# Altium PCB wind_sensor_pcb.PcbDoc
Units mm, origin at the board's own origin, x right, y up, seen from the top; angles counter-clockwise.
Board outline 31.24 x 67.82 mm, 2 copper layers (Top Layer, Bottom Layer); 15 components, 153 nets, 49 pads, 0 vias.
Unrouted connection lines stored in the file: 27.
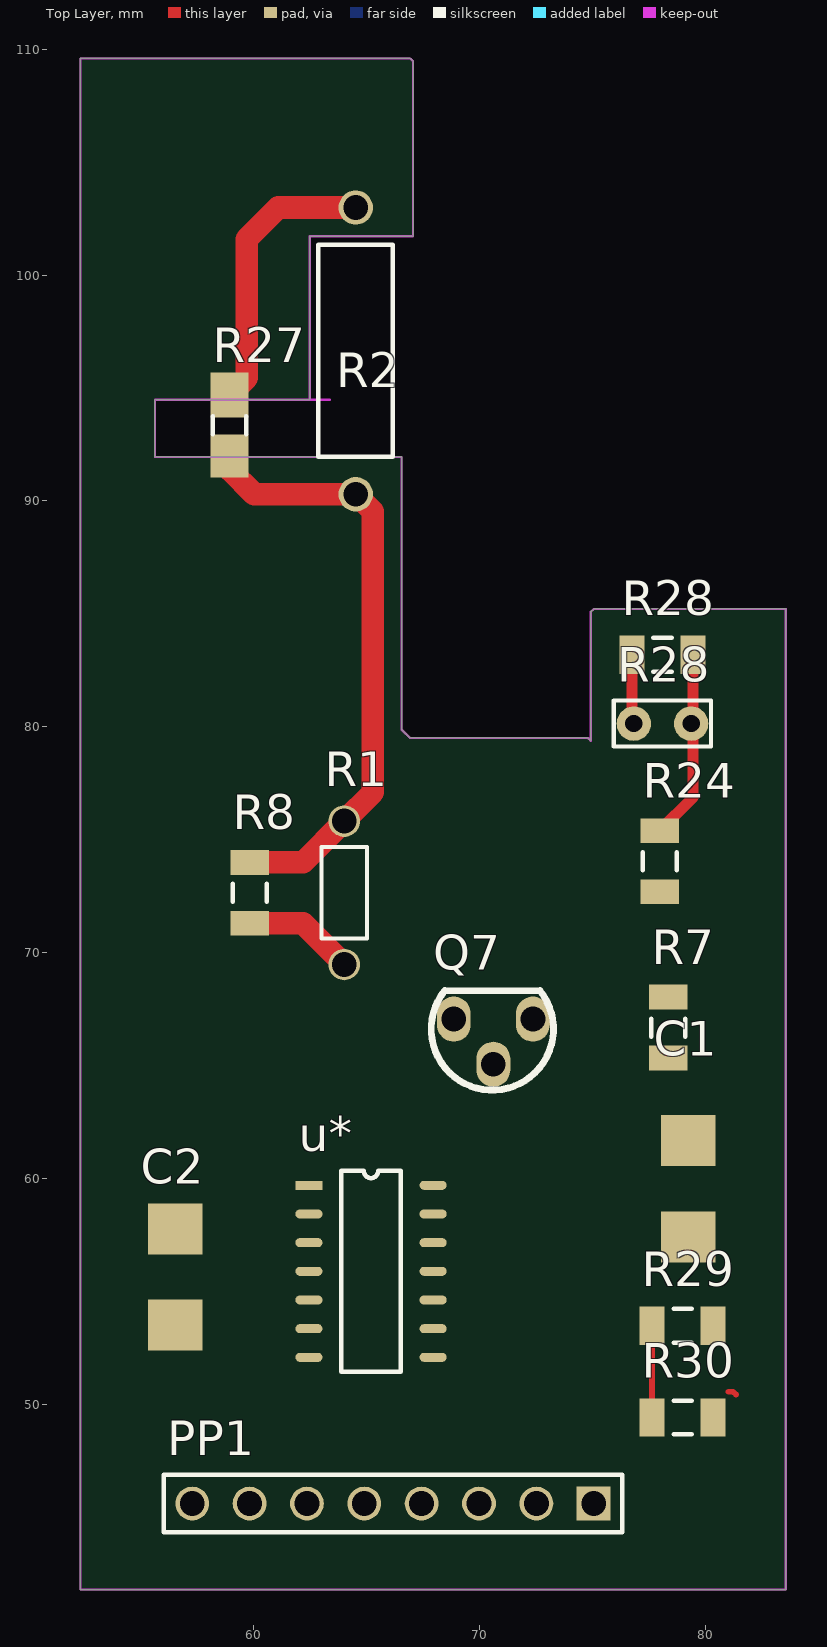
[diagram p0: Top Layer view]
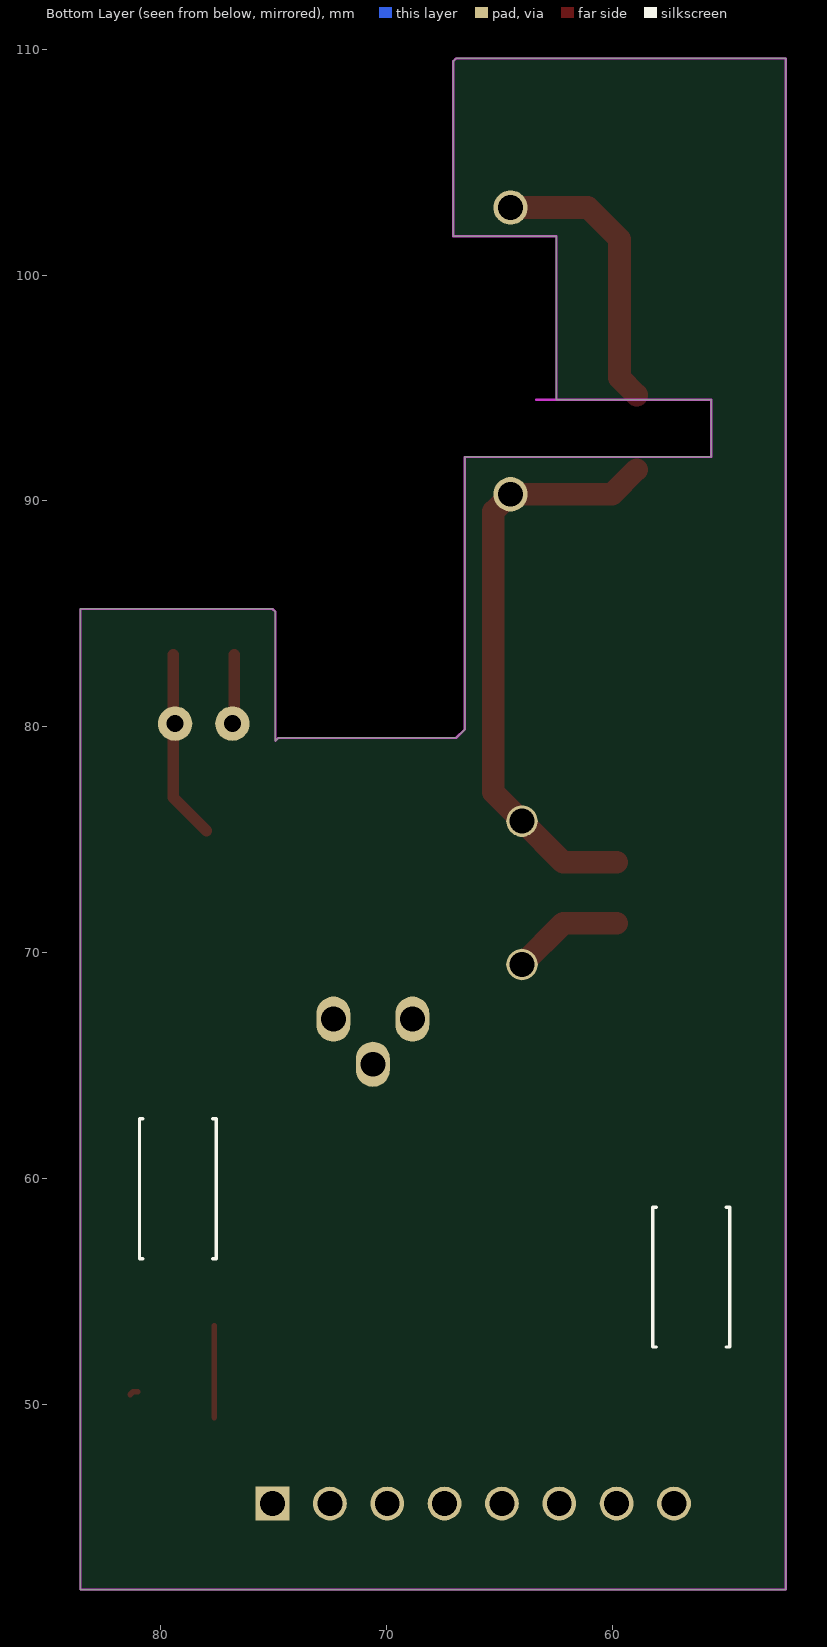
[diagram p1: Bottom Layer view, seen from below]

## Layer stack, top to bottom
Top Solder: solder mask 0.0102, Solder Resist, Dk 3.5
Top Layer: signal copper 0.0356
Dielectric 1: dielectric 0.32, FR-4, Dk 4.8
Bottom Layer: signal copper 0.0356
Bottom Solder: solder mask 0.0102, Solder Resist, Dk 3.5

## Board outline
55.626,91.948 55.626,94.488 62.484,94.488 62.484,101.727 67.056,101.727 67.056,109.474 66.929,109.601 52.324,109.601 52.324,41.783 83.566,41.783 83.566,85.217 75.057,85.217 74.93,85.09 74.93,79.375 74.803,79.502 66.929,79.502 66.548,79.883 66.548,91.948

## Design rules (kind name [scope] priority, off if disabled: settings)
Clearance [All] p1: gap=0.381 ignorepadtopadclearanceinfootprint=FALSE
PolygonConnect [All] p1: connectstyle=Relief reliefconductorwidth=0.254 reliefentries=4 polygonreliefangle="90 Angle" airgapwidth=0.254
RoutingVias [All] p1: holewidth=0.711 width=1.27 viastyle="Through Hole" minholewidth=0.711 minwidth=1.27 maxholewidth=0.711 maxwidth=1.27
SolderMaskExpansion [All] p1: expansion=0.102
Width [All] p1: maxlimit=0.254 minlimit=0.254 preferedwidth=0.254
30 further rules are at their usual default settings.

## Components (designator, comment, footprint, x,y, rotation, side; value= is the part's Value field where it differs from the comment)
C1 "0.1u" CAPCP6032X280N 79.248,59.538 r270 top
C2 "0.1u" CAPCP6032X280N 56.515,55.626 r90 top
PP1 "MPU6050" HDR1X8 75.057,45.593 r180 top
Q7 "2N2222" T4-TO92 71.862,66.799 r270 top
R1 "x" Res-(1/4) 64.008,72.644 r90 top
R2 "x" Res-(1/2) 64.516,90.297 r90 top
R7 "2K" 1206#1 78.359,66.675 r270 top
R8 "2.2" 1206#1 59.817,72.644 r90 top value=22
R24 "100" 1206#1 77.978,74.041 r90 top value=10K
R27 "51" 1206#2 58.928,93.345 r90 top value=22
R28 "x" Res-(1/4)-Stand 76.835,80.137 r0 top
R28 "10K ptc" 1206#1 78.105,83.185 r180 top value=10K
R29 "5K" 1206#1 78.994,53.467 r180 top
R30 "2K" 1206#1 78.994,49.403 r0 top
u* "4 op amp" SOP14 62.445,59.69 r0 top

## Footprints (in the part's own frame and the unit in brackets; to place one, negate y for a bottom-side part, rotate by r counter-clockwise, add the part's x,y. Pads: shape width x height; smd on the part's side, far side on the other; paste and mask are expansions set on the pad)
1206#1 [mm] "Chip Capacitor, Body 3.2x1.6mm, IPC High Density"
  rect 1.1x1.7 smd: 1(-1.35,0) 2(1.35,0)
  silkscreen extent -0.4,-0.75 0.4,0.75, body extent -1.7,-0.9 1.7,0.9, height 1.3
1206#2 [mm] "Chip Capacitor, Body 3.2x1.6mm, IPC High Density"
  rect 1.9x1.7 smd: 1(-1.35,0)
  rect 2x1.7 smd: 2(1.35,0)
  silkscreen extent -0.4,-0.75 0.4,0.75, body extent -1.7,-0.9 1.7,0.9, height 1.3
CAPCP6032X280N [mil]
  rect 89x95 smd: 1(-84,0) 2(84,0)
HDR1X8 [mm] "Connector; Header; 8 Position"
  rect 1.5x1.5 hole 1.1: 1(0,0)
  round 1.5 hole 1.1: 2(2.54,0) 3(5.08,0) 4(7.62,0) 5(10.16,0) 6(12.7,0) 7(15.24,0) 8(17.78,0)
  silkscreen extent -1.27,-1.27 19.05,1.27
Res-(1/2) [mil]
  round 60 hole 43.31: 1(0,0) 2(500,0)
  silkscreen extent 65,-65 435,65, body extent -12,-66 513,66, height 135
Res-(1/4) [mil]
  round 55 hole 43.31: 1(-125,0) 2(125,0)
  silkscreen extent -80,-40 80,40, body extent -135,-36 135,36, height 115
Res-(1/4)-Stand [mil]
  round 60 hole 30: 1(0,0) 2(100,0)
  silkscreen extent -35,-40 135,40, body extent -35,-35 111,37, height 287
SOP14 [mm]
  rect 1.2x0.4 smd: 1(0,0)
  oval 1.2x0.4 smd: 2(0,-1.27) 3(0,-2.54) 4(0,-3.81) 5(0,-5.08) 6(0,-6.35) 7(0,-7.62) 8(5.5,-7.62) 9(5.5,-6.35) 10(5.5,-5.08) 11(5.5,-3.81) 12(5.5,-2.54) 13(5.5,-1.27) 14(5.5,0)
  silkscreen extent 1.43,-8.25 4.07,0.64
T4-TO92 [mm]
  oval 2x1.5 hole 1.1: B(1.75,-1.25) C(-0.25,-3) E(-0.25,0.5)
  silkscreen extent -1.52,-4 2.89,1.41

## Part data
C1 C2: library part Cap, "Capacitor", LatestRevisionDate=17-Jul-2002, LatestRevisionNote="Re-released for DXP Platform.", PackageDescription="Radial Cap, Thru-Hole; 2 Leads; 0.3 in Pin Spacing", PackageReference=RAD-0.3, Published=8-Jun-2000, Publisher="Altium Limited", STATE=NOT-AVAILABLE, TYPE=tantalum
PP1: library part "Header 8", "Header, 8-Pin", LatestRevisionDate=17-Jul-2002, LatestRevisionNote="Re-released for DXP Platform.", Publisher="Altium Limited"
Q7: "NPN", De="Seyed Mohsen Ghasemian", E-mail=picpars@gmail.com, web=www.picpars.com
R1 R2 R7 R8 R24 R27 R28 R28 R29 R30: library part Resistor, "Resistor"
u*: library part "quad op amp"

## Nets (pads, with @x,y where several pads share a name; then routed paths per layer and width w, separated by ;. In a path a pad name is that pad's centre, name@x,y a point inside that pad or via, vN(x,y) a via of type N, cw(c..) or ccw(c..) an arc to the next point about the centre after c; other vN are vias at no path point)
1.1V: 
3.3V: 
12V: 
ADO: 
CLK: 
CS: 
DATA_humadity: 
GND: C2.2 PP1.8 R2.2 R27.2 R28.1@76.835,80.137 R28.2@76.755,83.185 R30.2 u*.11 | length 16.4
  Top Layer w0.254: 81.026,50.546 81.233,50.546 81.36,50.419
  Top Layer w0.5: R28.1@76.755,79.803 R28.2@76.755,83.185
  Top Layer w1: R27.2 59.69,95.457 59.69,101.6 61.087,102.997 R2.2
GPS_rx: 
GPS_tx: 
INT: 
"inveting 1": C1.2 PP1.7 R1.2 R2.1 R8.2 R27.1 u*.2 u*.10 | length 26.3
  Top Layer w1: R27.1@58.928,91.39 60.021,90.297 R2.1 65.278,89.535 65.278,77.089 R1.2 62.183,73.994 R8.2
"inveting 2": PP1.3 u*.6 u*.7
"inveting 4": u*.13
MICRO_RX3: 
MICRO_TX3: 
MISO2: 
MOSI2: 
NC: 
NetC1_1: 
NetC5_2: 
NetC6_2: 
NetC7_1: 
NetC16_2: 
NetC17_2: 
NetC18_2: 
NetC19_2: 
NetC45_2: 
NetC46_2: 
NetC48_2: 
NetC49_2: 
NetD1_1: 
NetD1_2: 
NetD2_1: 
NetD3_2: 
NetD4_2: 
NetD5_1: 
NetD6_1: 
NetD7_1: 
NetD8_1: 
NetD9_1: 
NetGD1_1: 
NetGD1_3: 
NetGD1_4: 
NetGQ1_1: 
NetJ2_1: 
NetK1_4: 
NetK1_8: 
NetK1_9: 
NetK1_13: 
NetK2_4: 
NetK2_8: 
NetK2_9: 
NetK2_13: 
NetK3_4: 
NetK3_8: 
NetK3_9: 
NetK3_13: 
NetK4_4: 
NetK4_8: 
NetK4_9: 
NetK4_13: 
NetK5_8: 
NetK5_9: 
NetK5_13: 
NetK6_4: 
NetK6_8: 
NetK6_9: 
NetK6_13: 
NetQ1_1: 
NetQ2_1: 
NetQ3_1: 
NetQ4_1: 
NetQ5_1: 
NetQ6_1: 
NetQ7_B: Q7.B R7.1
NetQ7_E: Q7.E R1.1 R8.1 R24.1 | length 4.9
  Top Layer w1: R8.1 62.183,71.294 R1.1
NetR4_1: 
NetR5_2: 
NetR12_2: 
NetR20_2: 
NetR25_2: 
NetR29_1: R29.1 u*.8 u*.9
Netu5_3: 
"non 1": PP1.5 R24.2 R28.1@79.455,83.185 R28.2@79.375,80.137 u*.3 | length 8.4
  Top Layer w0.5: R24.2 79.455,76.868 R28.1@79.455,83.185
"non 2": PP1.6 R29.2 R30.1 u*.5 | length 4.1
  Top Layer w0.254: R30.1 R29.2
NRST: 
NT: 
out1: C1.1 PP1.2 R7.2 u*.1
out3: PP1.4
out4: u*.14
PIR_DATA: 
PWRCONTROL: 
PWRKEY: 
RELAY1: 
RELAY2: 
RELAY3: 
RELAY4: 
RELAY5: 
RELAY6: 
RELAY7: 
RELAY8: 
RELAY9: 
RELAY10: 
RELAY11: 
RELAY12: 
RELAY13: 
RELAY14: 
RELAY15: 
RELAY16: 
RELAY17: 
RELAY18: 
RELAY19: 
RELAY20: 
RELAY21: 
RELAY22: 
RELAY23: 
RELAY24: 
RST: 
RX1: 
RX3: 
SCK_SPI: 
SCK_SPI2: 
SCL: 
SDA: 
SDA: 
SI: 
SIM_CLK: 
SIM_DATA: 
SIM_RST: 
SIM_VDD: 
SO: 
STATUS: 
SWCLK: 
SWDIO: 
temp_data: 
TX1: 
TX3: 
U2_NRST: 
U2_RX2: 
U2_SCK: 
U2_SI: 
U2_SO: 
U2_SWCLK: 
U2_SWDIO: 
U2_TX2: 
V3.3: 
V12: 
VBAT: 
VCC: C2.1 PP1.1 Q7.C u*.4
WOL: 
XCL: 
XDA: 
pads on no net: u*.12

## Keep-outs
Keep-Out Layer:
  lines w0.1: 52.324,41.783 83.566,41.783 83.566,85.217 75.057,85.217 74.93,85.09 74.93,79.375 74.803,79.502 66.929,79.502 66.548,79.883 66.548,91.948 55.626,91.948 55.626,94.488 63.373,94.488 62.484,94.488 62.484,101.727 67.056,101.727 67.056,109.474 66.929,109.601 52.324,109.601 52.324,41.783